# Altium PCB Vest.PcbDoc (part 1 of 2)
Units mm, origin at the board's own origin, x right, y up, seen from the top; angles counter-clockwise.
Board outline 98 x 59.3 mm, 4 copper layers (Top Layer, GND, Power, Bottom Layer), stack 0.603 mm thick; 89 components, 60 nets, 266 pads, 74 vias.
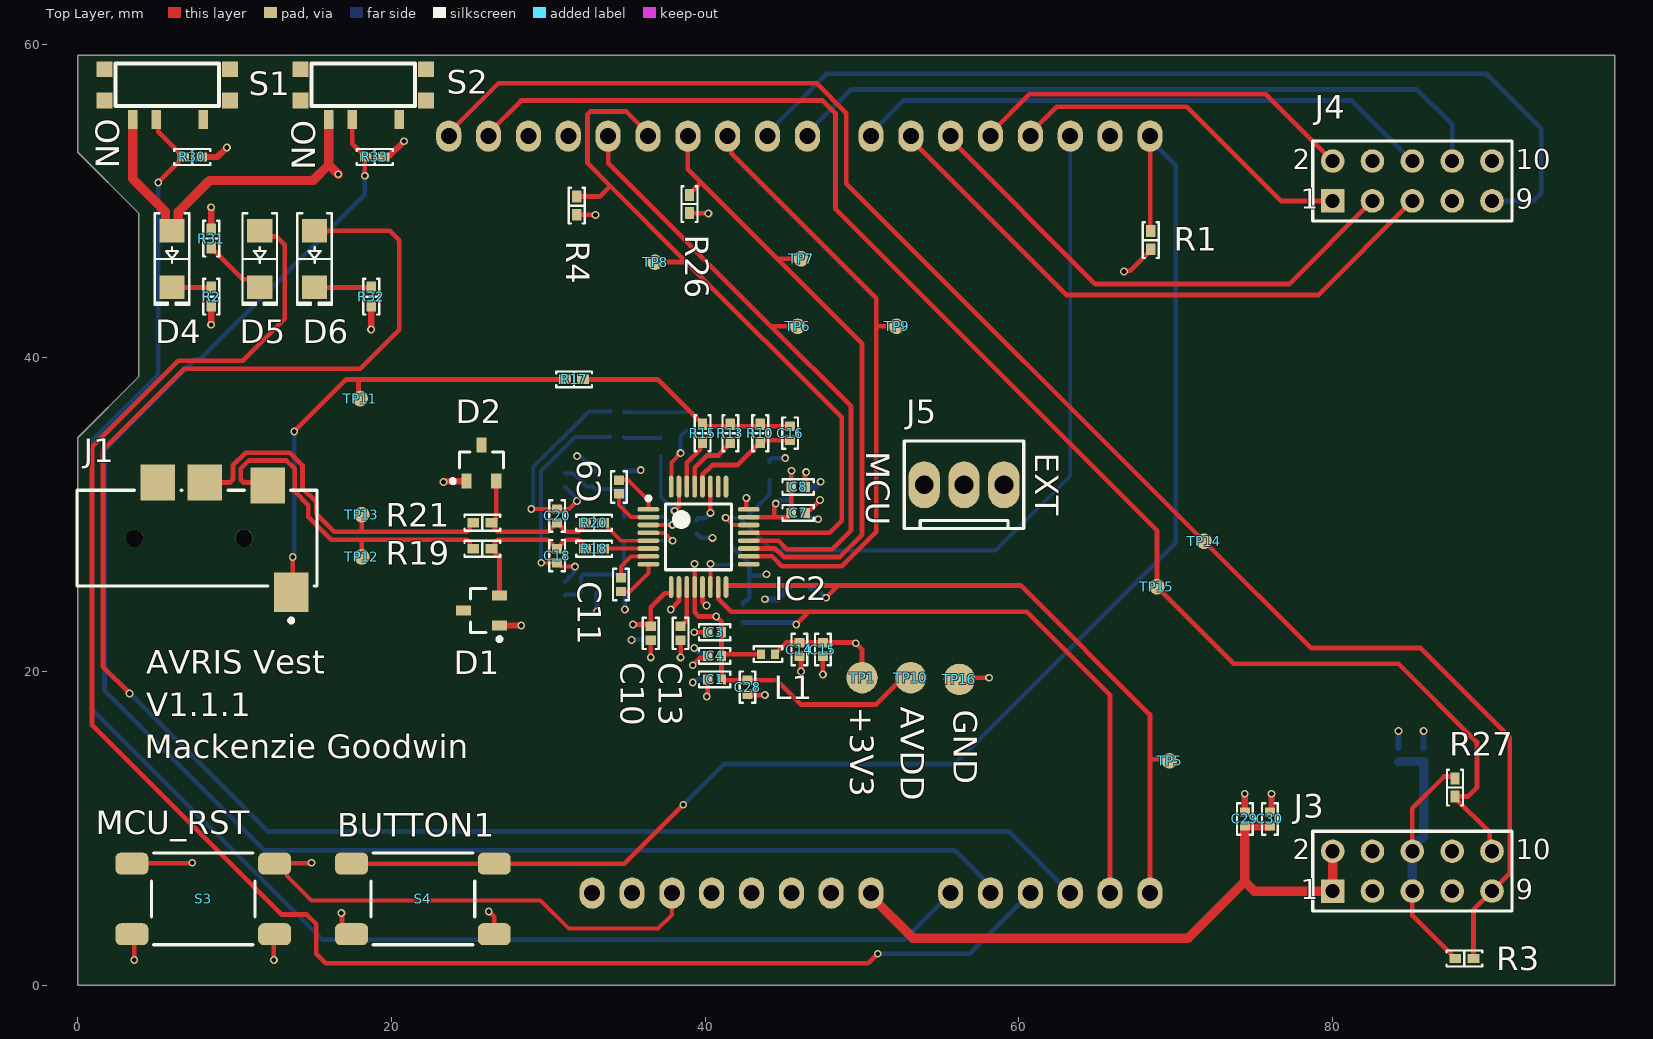
[diagram p0: Top Layer view]
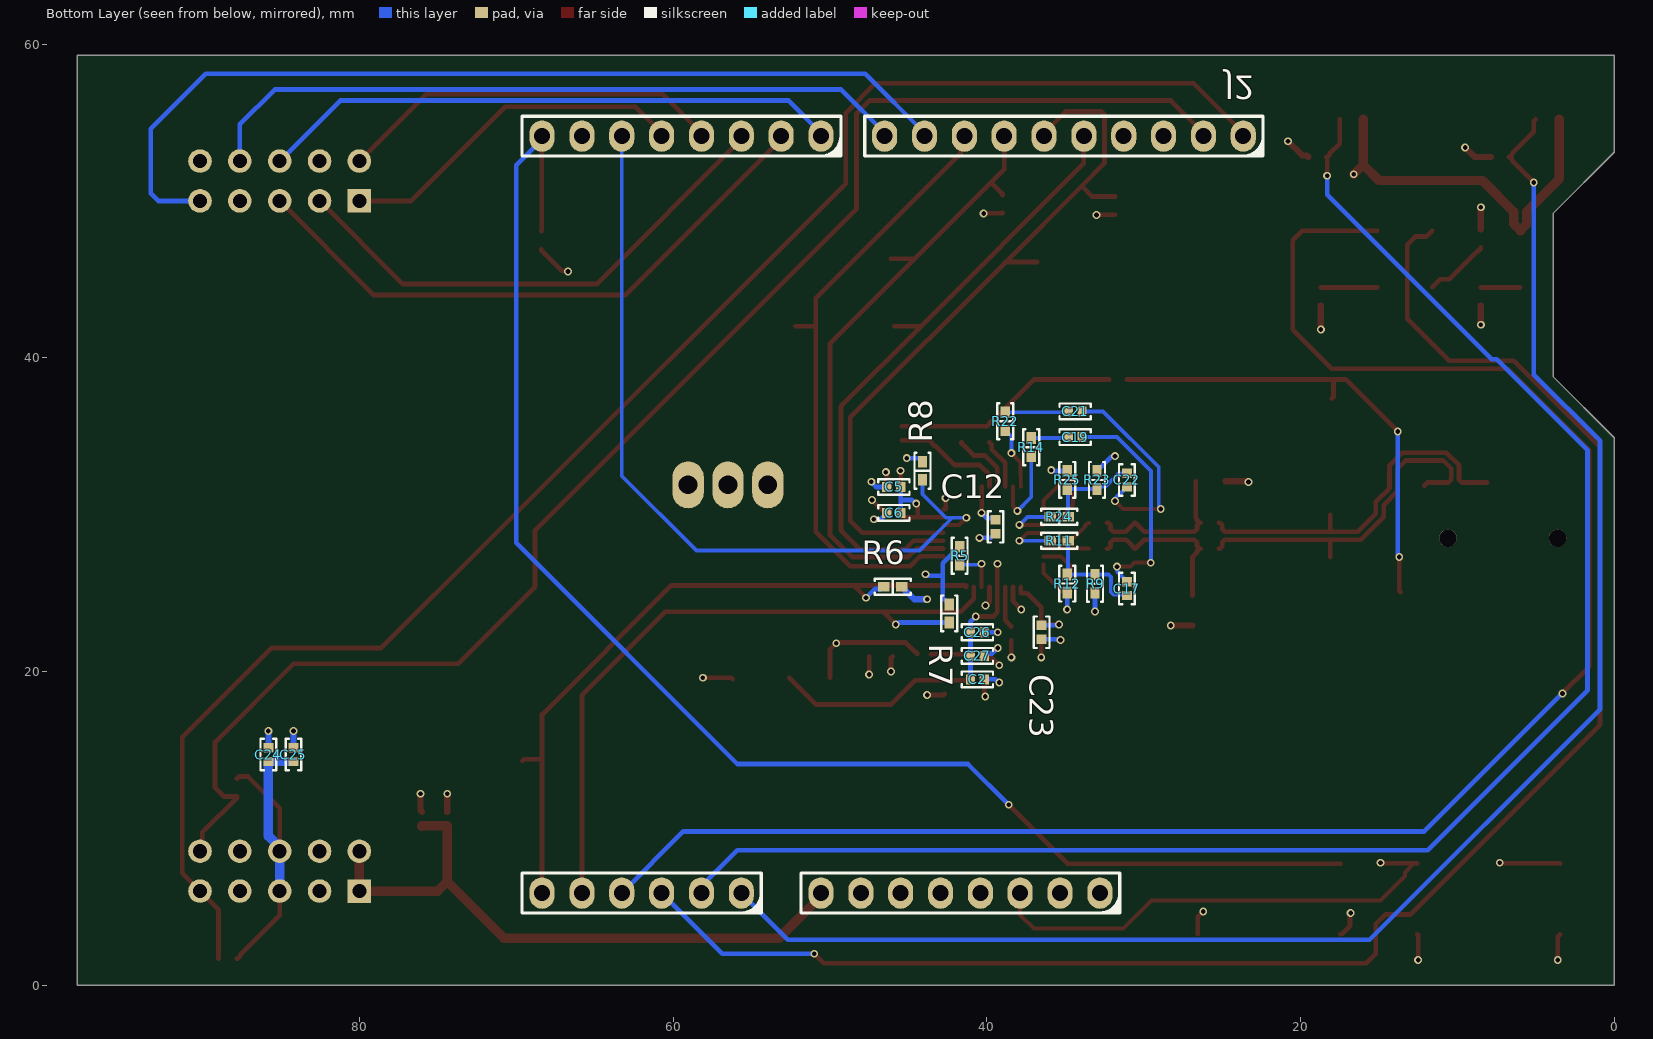
[diagram p1: Bottom Layer view, seen from below]
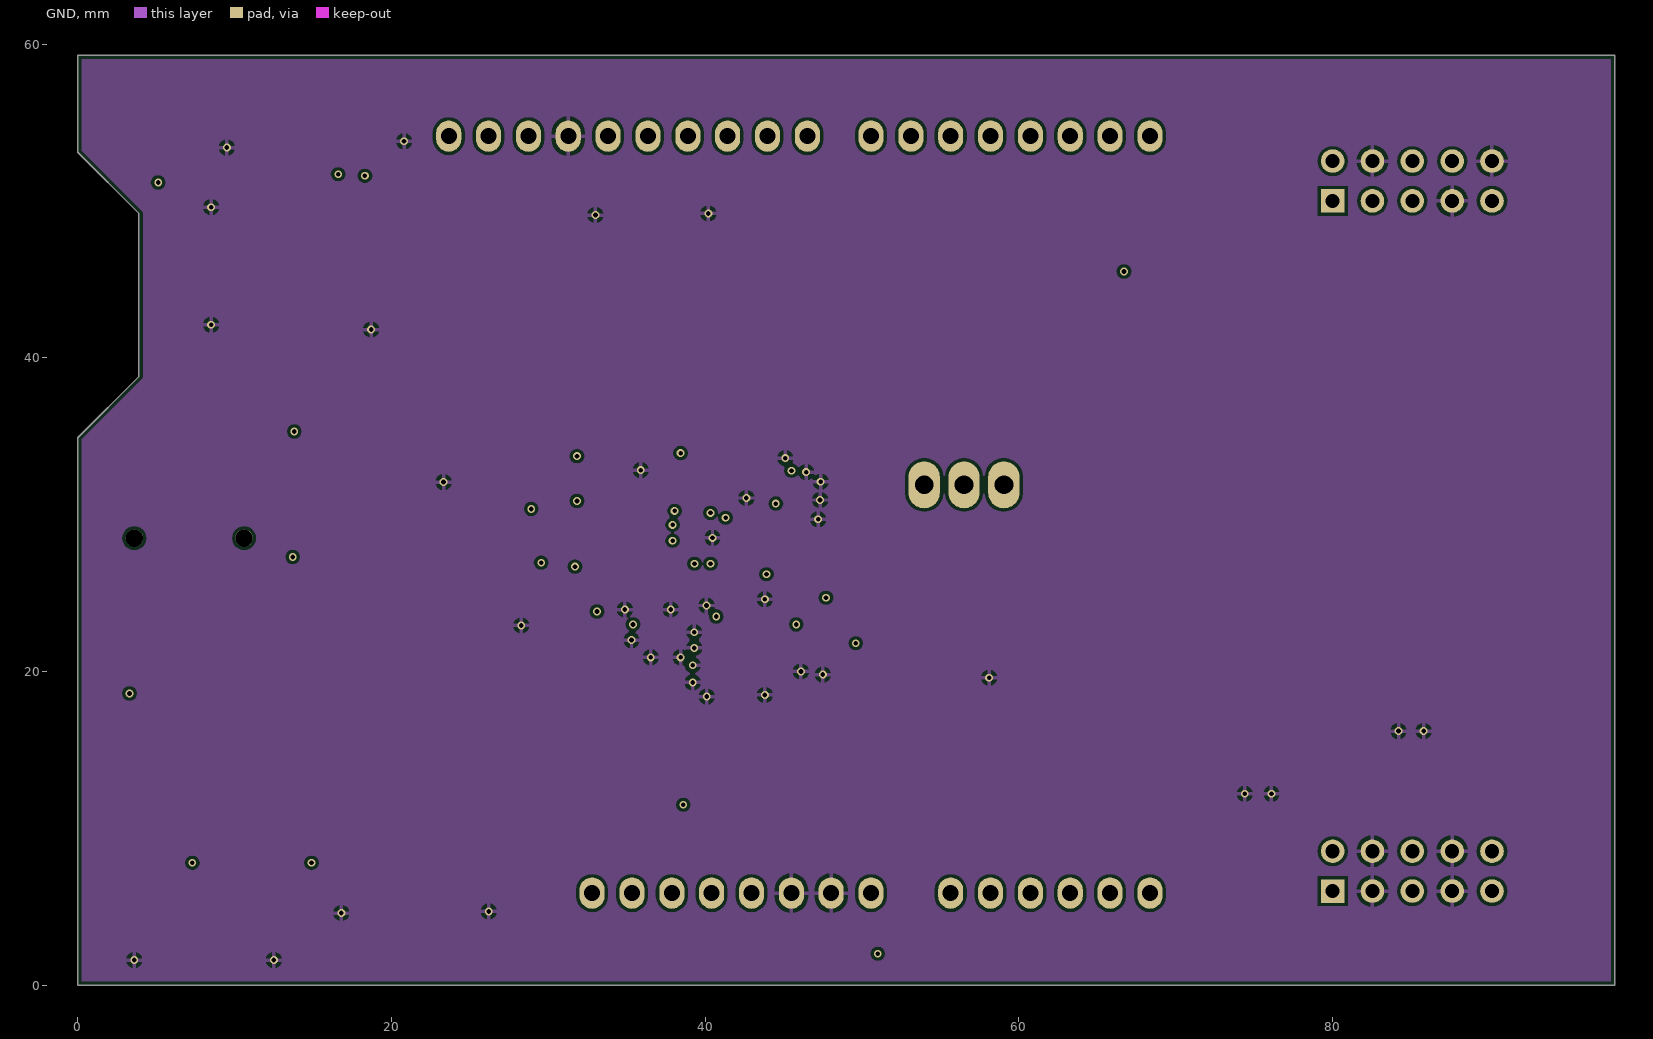
[diagram p2: GND]
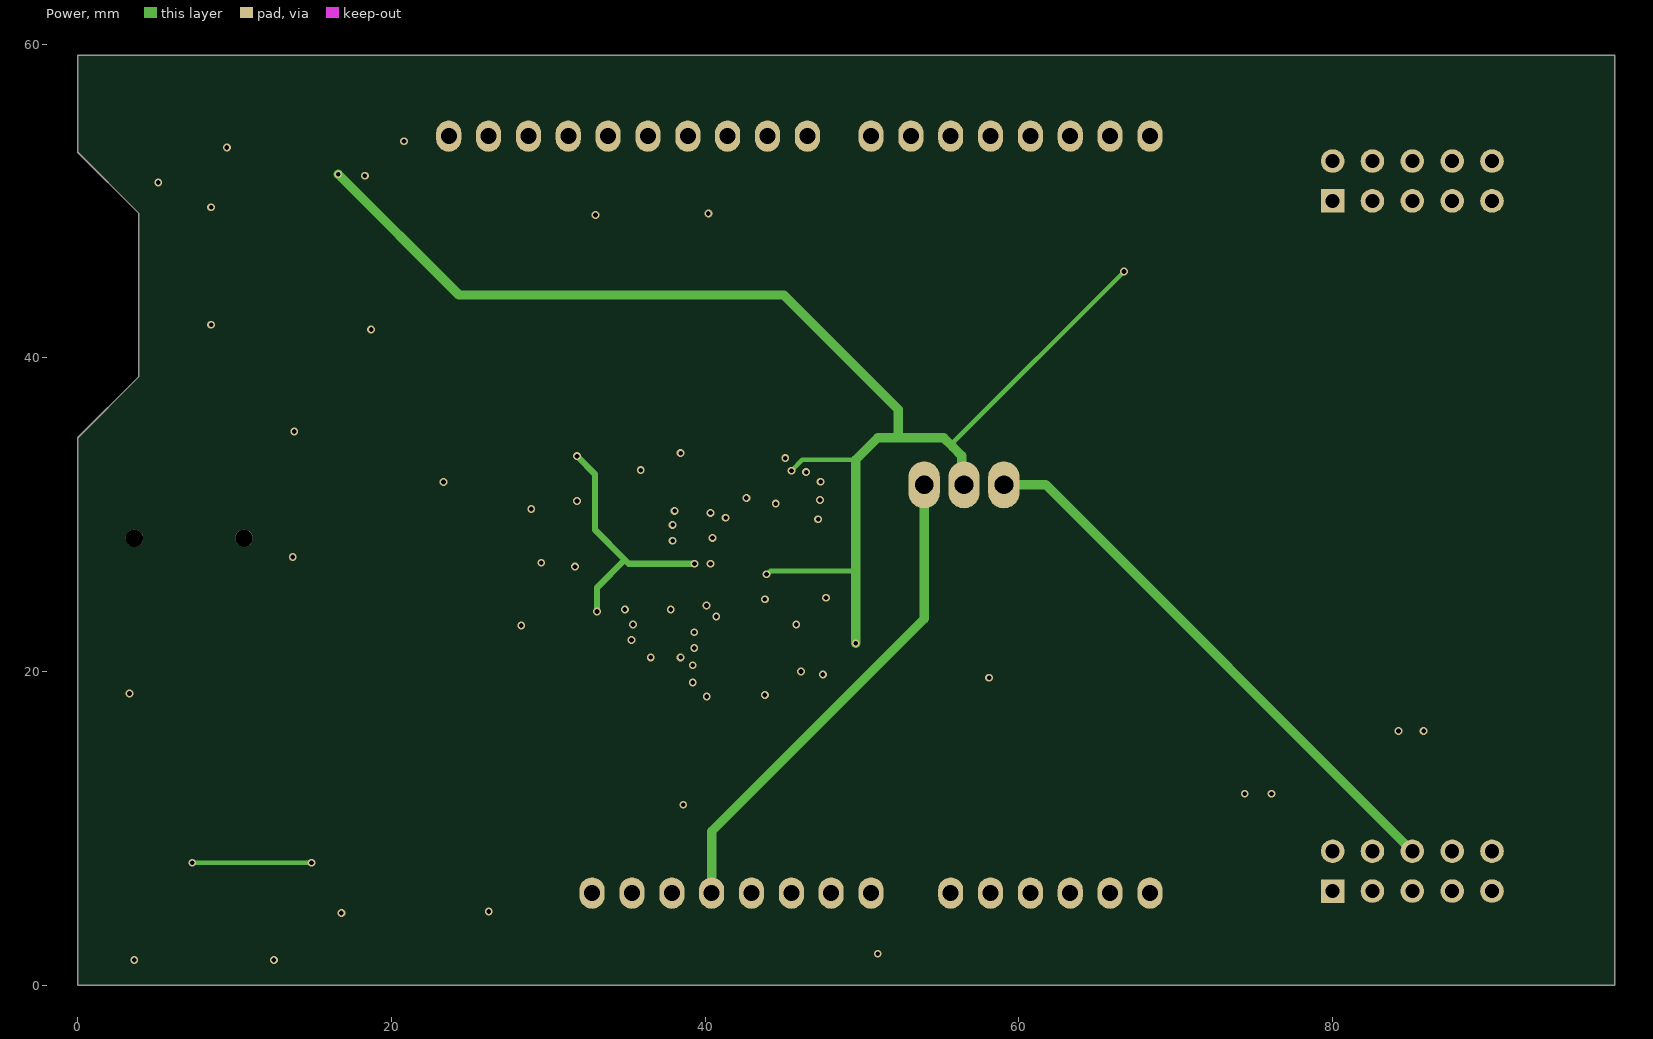
[diagram p3: Power]

## Layer stack, top to bottom
Top Solder: solder mask 0.0102, Solder Resist, Dk 3.5
Top Layer: signal copper 0.0356
Dielectric 2: prepreg 0.0711, PP-006, Dk 4.1
GND: signal copper 0.035
Dielectric 1: dielectric 0.32, FR-4, Dk 4.8
Power: signal copper 0.035
Dielectric 3: prepreg 0.0711, PP-006, Dk 4.1
Bottom Layer: signal copper 0.0356
Bottom Solder: solder mask 0.0102, Solder Resist, Dk 3.5

## Board outline
3.9,49.2 0,53.1 0,59.3 98,59.3 98,0 0,0 0,34.9 3.9,38.8

## Design rules (kind name [scope] priority, off if disabled: settings)
AssemblyTestPointUsage [All] p1: allowmultiple=TRUE
AssemblyTestpoint [All] p1: testpointundercomponent=TRUE minsize=0 maxsize=3 preferedsize=1.5 minholesize=0 maxholesize=1.016 preferedholesize=0 testpointgrid=0.025 usegrid=TRUE gridtolerance=0 allowsidetop=TRUE allowsidebottom=TRUE
BoardOutlineClearance [All] p1: gap=0.254 ignorepadtopadclearanceinfootprint=FALSE
Clearance [All] p1: gap=0.2 ignorepadtopadclearanceinfootprint=FALSE
DiffPairsRouting [All] p1: maxlimit=0.254 minlimit=0.2 mostfreqgap=0.2 toplayer_minwidth=0.2 toplayer_maxwidth=0.5 toplayer_prefwidth=0.3 midlayer1_minwidth=0.2 midlayer1_maxwidth=0.5 midlayer1_prefwidth=0.3 midlayer2_minwidth=0.2 midlayer2_maxwidth=0.5 midlayer2_prefwidth=0.3 bottomlayer_minwidth=0.2 bottomlayer_maxwidth=0.5 bottomlayer_prefwidth=0.3 maxuncoupledlength=12.7
FabricationTestPointUsage [All] p1: valid=0 allowmultiple=TRUE
FabricationTestpoint [All] p1: side=3 testpointundercomponent=TRUE minsize=1 maxsize=3 preferedsize=1.5 minholesize=0 maxholesize=1.016 preferedholesize=0 testpointgrid=0.025 allowsidetop=TRUE allowsidebottom=TRUE usegrid=TRUE gridtolerance=0
MinimumSolderMaskSliver [All] p1: minsoldermaskwidth=0.1
PolygonConnect [All] p1: connectstyle=Relief reliefconductorwidth=0.254 reliefentries=4 polygonreliefangle="90 Angle" airgapwidth=0.254
RoutingVias [All] p1: holewidth=0.2 width=0.5 viastyle="Through Hole" minholewidth=0.3 minwidth=0.5 maxholewidth=0.7 maxwidth=1.5
SilkToSilkClearance [All] p1: silktosilkclearance=0.2
SilkToSolderMaskClearance [IsPad] p1: minsilkscreentomaskgap=0.1 clearancetoexposedcopper=TRUE
SolderMaskExpansion [All] p1: expansion=0.102 istentingtop=FALSE
Width [All] p1: maxlimit=1 minlimit=0.2 preferedwidth=0.3
22 further rules are at their usual default settings.

## Classes and differential pairs
net class SWT[1..2]: SWT1 SWT2
net class LED[1..2]: LED1 LED2
component class External: C24 C25 C29 C30 J3 J4 R3 R27
net class GPIO[1..7]: GPIO1 GPIO2 GPIO3 GPIO4 GPIO5 GPIO6 GPIO7
component class Vest: D4 D5 D6 J5 R1 R2 R30 R31 R32 R33 S1 S2 S3 S4 TP1 TP16
component class MCU: J2 R4 R26 TP14 TP15
component class ECG: C1 C2 C3 C4 C5 C6 C7 C8 C9 C10 C11 C12 C13 C14 C15 C16 C17 C18 C19 C20 C21 C22 C23 C26 C27 C28 D1 D2 IC2 L1 R5 R6 R7 R8 R9 R10 R11 R12 R13 R14 R15 R17 R18 R19 R20 R21 R22 R23 R24 R25 TP5 TP6 TP7 TP8 TP9 TP10 TP11 TP12 TP13
differential pair IN: +IN_P -IN_N
differential pair INPROT: +INPROT_P -INPROT_N

## Components (designator, comment, footprint, x,y, rotation, side; value= is the part's Value field where it differs from the comment)
C1 "10µF" "CAP 0402_1005" 40.6,19.5 r180 top
C2 "0.1µF" "CAP 0402_1005" 40.6,19.5 r180 bottom
C3 "0.1µF" "CAP 0402_1005" 40.6,22.5 r180 top
C4 "1µF" "CAP 0402_1005" 40.6,21 r180 top
C5 "0.1µF" "CAP 0402_1005" 45.925,31.761 r0 bottom
C6 "0.1µF" "CAP 0402_1005" 45.925,30.11 r0 bottom
C7 "1µF" "CAP 0402_1005" 45.925,30.11 r0 top
C8 "1µF" "CAP 0402_1005" 45.925,31.761 r0 top
C9 "4700pF" "CAP 0402_1005" 34.495,31.761 r90 top
C10 "10µF" "CAP 0402_1005" 36.527,22.431 r270 top
C11 "4700pF" "CAP 0402_1005" 34.622,25.538 r90 top
C12 "1µF" "CAP 0402_1005" 39.448,29.221 r270 bottom
C13 "1µF" "CAP 0402_1005" 38.432,22.431 r270 top
C14 "1µF" "CAP 0402_1005" 46,21.4 r270 top
C15 "0.1µF" "CAP 0402_1005" 47.5,21.4 r270 top
C16 "1500pF" "CAP 0402_1005" 45.417,35.19 r90 top
C17 "2200pF" "CAP 0402_1005" 31.066,25.284 r90 bottom
C18 "0.1µF" "CAP 0402_1005" 30.558,27.384 r90 top
C19 "2200pF" "CAP 0402_1005" 34.368,34.936 r180 bottom
C20 "0.1µF" "CAP 0402_1005" 30.558,29.915 r270 top
C21 "2200pF" "CAP 0402_1005" 34.368,36.587 r180 bottom
C22 "2200pF" "CAP 0402_1005" 31.066,32.21 r90 bottom
C23 "0.1µF" "CAP 0402_1005" 36.5,22.5 r270 bottom
C24 "1µF" "CAP 0402_1005" 85.8,14.7 r90 bottom
C25 "0.1µF" "CAP 0402_1005" 84.2,14.7 r90 bottom
C26 "1µF" "CAP 0402_1005" 40.6,22.5 r180 bottom
C27 "1µF" "CAP 0402_1005" 40.6,21 r180 bottom
C28 "10µF" "CAP 0402_1005" 42.7,19 r270 top
C29 "1µF" "CAP 0402_1005" 74.4,10.6 r90 top
C30 "0.1µF" "CAP 0402_1005" 76,10.6 r90 top
D1 "PESD5V0X1BT,215" "DIODES SOT-23-3" 25.732,23.887 r180 top
D2 "PESD5V0X1BT,215" "DIODES SOT-23-3" 25.732,33.285 r90 top
D4 "Red" "LED 1206_3216 RED" 6,46.3 r270 top
D5 "Red" "LED 1206_3216 RED" 11.6,46.3 r270 top
D6 "Red" "LED 1206_3216 RED" 15.1,46.3 r270 top
IC2 "ADS1292RIPBS" "TI PQFP-32 5X5MM" 39.575,28.586 r0 top
J1 "SJ2-3574A-SMT-TR" "CUI SJ2-3574A-SMT-TR" 7.6,28.5 r0 top
J2 "920-0088-01" "SCHMARTBOARD - 920-0088-01" 46,30 r90 bottom locked
J3 "Header 5X2" HDR2X5 80,6 r0 top
J4 "Header 5X2" HDR2X5 80,50 r0 top
J5 "0022272031" "MOLEX KK 0022272031" 56.5,31.9 r0 top
L1 "560nH" "IND 0402_1005" 44,21.1 r180 top
R1 "10 kΩ" "RES 0402_1005" 68.4,47.5 r90 top value="10 kOhms"
R2 "1.6 kΩ" "RES 0402_1005" 8.5,43.9 r90 top value="1.6 kOhms"
R3 "10 kΩ" "RES 0402_1005" 88.4,1.7 r0 top value="10 kOhms"
R4 "100 kΩ" "RES 0402_1005" 31.8,49.7 r270 top value="100 kOhms"
R5 "10 kΩ" "RES 0402_1005" 41.734,27.376 r270 bottom value="10 kOhms"
R6 "10 kΩ" "RES 0402_1005" 46,25.4 r180 bottom value="10 kOhms"
R7 "10 kΩ" "RES 0402_1005" 42.4,23.7 r270 bottom value="10 kOhms"
R8 "10 kΩ" "RES 0402_1005" 44.1,32.8 r90 bottom value="10 kOhms"
R9 "10 MΩ" "RES 0402_1005" 33.098,25.598 r90 bottom value="10 MOhms"
R10 "1 MΩ" "RES 0402_1005" 43.512,35.19 r90 top value="1 MOhms"
R11 "0 Ω" "RES 0402_1005" 35.384,28.332 r180 bottom value="0 Ohms"
R12 "10 MΩ" "RES 0402_1005" 34.876,25.605 r90 bottom value="10 MOhms"
R13 "100 kΩ" "RES 0402_1005" 41.607,35.19 r90 top value="100 kOhms"
R14 "40.2 kΩ" "RES 0402_1005" 37.162,34.301 r90 bottom value="40.2 kOhms"
R15 "0 Ω" "RES 0402_1005" 39.829,35.19 r270 top value="0 Ohms"
R17 "100 kΩ" "RES 0402_1005" 31.634,38.619 r0 top value="100 kOhms"
R18 "0 Ω" "RES 0402_1005" 32.911,27.824 r180 top value="0 Ohms"
R19 "100 kΩ" "RES 0402_1005" 25.792,27.824 r180 top value="100 kOhms"
R20 "0 Ω" "RES 0402_1005" 32.911,29.475 r180 top value="0 Ohms"
R21 "100 kΩ" "RES 0402_1005" 25.792,29.475 r180 top value="100 kOhms"
R22 "40.2 kΩ" "RES 0402_1005" 38.813,35.952 r90 bottom value="40.2 kOhms"
R23 "10 MΩ" "RES 0402_1005" 32.971,32.209 r270 bottom value="10 MOhms"
R24 "0 Ω" "RES 0402_1005" 35.384,29.856 r180 bottom value="0 Ohms"
R25 "10 MΩ" "RES 0402_1005" 34.876,32.209 r270 bottom value="10 MOhms"
R26 "100 kΩ" "RES 0402_1005" 39,49.8 r270 top value="100 kOhms"
R27 "10 kΩ" "RES 0402_1005" 87.8,12.6 r270 top value="10 kOhms"
R30 "10 kΩ" "RES 0402_1005" 7.3,52.8 r0 top value="10 kOhms"
R31 "1.6 kΩ" "RES 0402_1005" 8.5,47.6 r270 top value="1.6 kOhms"
R32 "1.6 kΩ" "RES 0402_1005" 18.7,43.9 r90 top value="1.6 kOhms"
R33 "10 kΩ" "RES 0402_1005" 18.925,52.8 r0 top value="10 kOhms"
S1 "CUS-12TB" "NCE CUS-12TB" 5.7,57.4 r180 top
S2 "CUS-12TB" "NCE CUS-12TB" 18.2,57.4 r180 top
S3 "1571563-4" "TE FSM4JSMA" 8,5.5 r90 top
S4 "1571563-4" "TE FSM4JSMA" 22,5.5 r90 top
TP1 "TP2MM" "Test Point 2MM" 50,19.6 r0 top
TP5 "TP1MM" "Test Point 1MM" 69.6,14.3 r180 top
TP6 "TP1MM" "Test Point 1MM" 45.9,42 r180 top
TP7 "TP1MM" "Test Point 1MM" 46.113,46.311 r180 top
TP8 "TP1MM" "Test Point 1MM" 36.8,46.1 r180 top
TP9 "TP1MM" "Test Point 1MM" 52.2,42 r180 top
TP10 "TP2MM" "Test Point 2MM" 53.1,19.6 r90 top
TP11 "TP1MM" "Test Point 1MM" 18,37.4 r90 top
TP12 "TP1MM" "Test Point 1MM" 18.1,27.3 r180 top
TP13 "TP1MM" "Test Point 1MM" 18.1,30 r180 top
TP14 "TP1MM" "Test Point 1MM" 71.8,28.3 r90 top
TP15 "TP1MM" "Test Point 1MM" 68.8,25.4 r90 top
TP16 "TP2MM" "Test Point 2MM" 56.2,19.5 r90 top

## Footprints (in the part's own frame and the unit in brackets; to place one, negate y for a bottom-side part, rotate by r counter-clockwise, add the part's x,y. Pads: shape width x height; smd on the part's side, far side on the other; paste and mask are expansions set on the pad)
"CAP 0402_1005" [mm] "Chip Capacitor, 2-Leads, Body 1.02x0.51mm, IPC Medium Density"
  rect 0.6x0.64 smd: 1(-0.44,0) 2(0.44,0)
  silkscreen extent -1,-0.5 1,0.5, body extent -0.5,-0.26 0.5,0.26, height 0.52
"CUI SJ2-3574A-SMT-TR" [mm]
  rect 2.2x2.5 smd paste+0 mask+0: 1(6,-3.45)
  rect 2.2x2.3 smd paste+0 mask+0: 2(4.5,3.35) 3(0.5,3.55) 4(-2.5,3.55)
  round 1.1 hole 1.1 unplated paste-1000 mask+0: ""(-4,0) ""(3,0)
  silkscreen extent -7.65,-5.37 7.65,3.05, body extent -7.63,-4.2 7.37,4.2, height 5.35
"DIODES SOT-23-3" [mm] "SOT23, 3-Leads, Body 2.90x2.40mm, Pitch 0.95mm, IPC Medium Density"
  rect 0.95x0.65 smd: 1(-1.15,0.95) 2(-1.15,-0.95) 3(1.15,0)
  silkscreen extent -1.28,-1.4 0.7,1.95, body extent -1.41,-1.45 1.41,1.45, height 1.5
HDR2X5 [mm] "Connector; Header; 5x2 Position"
  rect 1.5x1.5 hole 0.9: 1(0,0)
  round 1.5 hole 0.9: 2(0,2.54) 3(2.54,0) 4(2.54,2.54) 5(5.08,0) 6(5.08,2.54) 7(7.62,0) 8(7.62,2.54) 9(10.16,0) 10(10.16,2.54)
  silkscreen extent -1.27,-1.27 11.43,3.81
"IND 0402_1005" [mm] "Inductor, 2-Leads, Body 1.02x0.51mm, IPC Medium Density"
  rect 0.5x0.6 smd: 1(-0.44,0) 2(0.44,0)
  silkscreen extent -0.9,-0.5 0.9,0.5, body extent -0.5,-0.3 0.5,0.3, height 0.6
"LED 1206_3216 RED" [mm] "Chip Diode, 2-Leads, Body 3.13x1.55mm, IPC Medium Density"
  rect 1.5x1.6 smd: 1(-1.8,0) 2(1.8,0)
  silkscreen extent -2.92,-1.1 2.92,1.1, body extent -1.6,-0.8 1.6,0.8, height 0.9
"MOLEX KK 0022272031" [mm]
  oval 2x3 hole 1.2: 1(-2.54,0) 2(0,0) 3(2.54,0)
  silkscreen extent -3.81,-2.79 3.81,2.79, body extent -3.81,-2.9 3.81,2.9, height 11.7
"NCE CUS-12TB" [mm]
  rect 1x1 smd: 0(-4,-1) 0(-4,1) 0(4,-1) 0(4,1)
  round 1 on Mech1: 0(-1.4,0) 0(1.4,0)
  rect 0.6x1.2 smd: 1(-2.3,2.2) 2(0.7,2.2) 3(2.2,2.2)
  silkscreen extent -3.3,-1.35 3.3,1.35, body extent -3.85,-2.8 3.85,2.2, height 1.4
"RES 0402_1005" [mm] "Chip Resistor, 2-Leads, Body 1.0x0.5mm, IPC Medium Density"
  rect 0.75x0.6 smd: 1(-0.575,0) 2(0.575,0)
  silkscreen extent -1.14,-0.51 1.14,0.51, body extent -0.5,-0.25 0.5,0.25, height 0.35
"SCHMARTBOARD - 920-0088-01" [mm] "Arduino pin header set"
  oval 2x1.6 hole 1.02: 1(-24.13,-13.21) 2(-24.13,-10.67) 3(-24.13,-8.13) 4(-24.13,-5.59) 5(-24.13,-3.05) 6(-24.13,-0.51) 7(-24.13,2.03) 8(-24.13,4.57) 9(-24.13,9.65) 10(-24.13,12.19) 11(-24.13,14.73) 12(-24.13,17.27) 13(-24.13,19.81) 14(-24.13,22.35) 15(24.13,22.35) 16(24.13,19.81) 17(24.13,17.27) 18(24.13,14.73) 19(24.13,12.19) 20(24.13,9.65) 21(24.13,7.11) 22(24.13,4.57) 23(24.13,0.51) 24(24.13,-2.03) 25(24.13,-4.57) 26(24.13,-7.11) 27(24.13,-9.65) 28(24.13,-12.19) 29(24.13,-14.73) 30(24.13,-17.27) 31(24.13,-19.81) 32(24.13,-22.35)
  silkscreen extent -25.4,-23.62 25.4,23.62, body extent -25.4,-23.62 25.4,23.62, height 8.5
"TE FSM4JSMA" [mm]
  rrect50% 1.4x2.1 smd: 1(2.25,4.55) 2(2.25,-4.55) 3(-2.25,4.55) 4(-2.25,-4.55)
  silkscreen extent -2.92,-3.3 2.92,3.3, body extent -3,-5 3,5, height 5.08
"Test Point 1MM" [mm]
  round 1 smd: 1(0,0)
"Test Point 2MM" [mm]
  round 2 smd: 1(0,0)
"TI PQFP-32 5X5MM" [mm] "TSQFP, 32-Leads, Body 5.00x5.00mm, Pitch 0.50mm, IPC Medium Density"
  oval 1.4x0.3 smd: 1(-3.2,1.75) 2(-3.2,1.25) 3(-3.2,0.75) 4(-3.2,0.25) 5(-3.2,-0.25) 6(-3.2,-0.75) 7(-3.2,-1.25) 8(-3.2,-1.75) 17(3.2,-1.75) 18(3.2,-1.25) 19(3.2,-0.75) 20(3.2,-0.25) 21(3.2,0.25) 22(3.2,0.75) 23(3.2,1.25) 24(3.2,1.75)
  oval 0.3x1.4 smd: 9(-1.75,-3.2) 10(-1.25,-3.2) 11(-0.75,-3.2) 12(-0.25,-3.2) 13(0.25,-3.2) 14(0.75,-3.2) 15(1.25,-3.2) 16(1.75,-3.2) 25(1.75,3.2) 26(1.25,3.2) 27(0.75,3.2) 28(0.25,3.2) 29(-0.25,3.2) 30(-0.75,3.2) 31(-1.25,3.2) 32(-1.75,3.2)
  silkscreen extent -3.32,-2.1 2.1,2.57, body extent -2.5,-2.5 2.5,2.5, height 1.2

## Part data
C1 C10 C28: library part 0402ZD106MAT2A, "CAP CER 10UF 10V X5R 0402", Device Package="0402 (1005 Metric)", Manufacturer="AVX Corporation", Operating Temperature="-55°C ~ 85°C", Supplier Part Number 1=478-10052-1-ND, Temperature Coefficient=X5R, Tolerance=±20%, Voltage - Rated=10V, Applications="General Purpose", Capacitance=10µF, ComponentLink1Description=Datasheet, ComponentLink1URL=http://datasheets.avx.com/cx5r.pdf, ComponentLink2Description="DigiKey Link", ComponentLink2URL=http://digikey.com/product-detail/en/avx-corporation/0402ZD106MAT2A/478-10052-1-ND/6564275, LastUpdated="2020-02-03 5:04:16 PM", Lifecycle Status=Active, Minimum Order=1, Mounting Type="Surface Mount, MLCC", Package / Case="0402 (1005 Metric)", Packaging=TapeAndReel, Part Number=0402ZD106MAT2A, Part Status=Active, Price=0.24, Series=-, Size / Dimension="0.039\" L x 0.020\" W (1.00mm x 0.50mm)", Supplier 1=DigiKey, Thickness (Max)="0.028\" (0.71mm)"
C2 C3 C5 C6 C15 C23 C25 C30: library part 04023C104JAT2A, "CAP CER 0.1UF 25V X7R 0402", Device Package="0402 (1005 Metric)", Manufacturer="AVX Corporation", Operating Temperature="-55°C ~ 125°C", Supplier Part Number 1=478-10050-1-ND, Temperature Coefficient=X7R, Tolerance=±5%, Voltage - Rated=25V, Applications="General Purpose", Capacitance=0.1µF, ComponentLink1Description=Datasheet, ComponentLink1URL=http://datasheets.avx.com/X7RDielectric.pdf, ComponentLink2Description="DigiKey Link", ComponentLink2URL=http://digikey.com/product-detail/en/avx-corporation/04023C104JAT2A/478-10050-1-ND/6564273, LastUpdated="2020-02-03 5:03:51 PM", Lifecycle Status=Active, Minimum Order=1, Mounting Type="Surface Mount, MLCC", Package / Case="0402 (1005 Metric)", Packaging=CutTape, Part Number=04023C104JAT2A, Part Status=Active, Price=0.14, Series=-, Size / Dimension="0.039\" L x 0.020\" W (1.00mm x 0.50mm)", Supplier 1=DigiKey, Thickness (Max)="0.022\" (0.56mm)"
C4 C7 C8 C12 C13 C14 C24 C26 C27 C29: library part 0402ZD105KAT2A, "CAP CER 1UF 10V X5R 0402", Device Package="0402 (1005 Metric)", Manufacturer="AVX Corporation", Operating Temperature="-55°C ~ 85°C", Supplier Part Number 1=478-4596-1-ND, Temperature Coefficient=X5R, Tolerance=±10%, Voltage - Rated=10V, Applications="General Purpose", Capacitance=1µF, ComponentLink1Description=Datasheet, ComponentLink1URL=http://datasheets.avx.com/cx5r.pdf, ComponentLink2Description="DigiKey Link", ComponentLink2URL=http://digikey.com/product-detail/en/avx-corporation/0402ZD105KAT2A/478-4596-1-ND/1645907, LastUpdated="2020-02-03 5:04:20 PM", Lifecycle Status=Active, Minimum Order=1, Mounting Type="Surface Mount, MLCC", Package / Case="0402 (1005 Metric)", Packaging=TapeAndReel, Part Number=0402ZD105KAT2A, Part Status=Active, Price=0.03, Series=-, Size / Dimension="0.039\" L x 0.020\" W (1.00mm x 0.50mm)", Supplier 1=DigiKey, Thickness (Max)="0.022\" (0.56mm)"
C9 C11: library part C0402C472K4RECAUTO, "CAP CER 0402 4.7NF 16V X7R 10%", Device Package="0402 (1005 Metric)", Manufacturer=KEMET, Operating Temperature="-55°C ~ 125°C", Ratings=AEC-Q200, Supplier Part Number 1=399-17875-1-ND, Temperature Coefficient=X7R, Tolerance=±10%, Voltage - Rated=16V, Applications="Automotive, ESD Protection", Capacitance=4700pF, ComponentLink1Description=Datasheet, ComponentLink1URL=https://api.kemet.com/component-edge/download/datasheet/C0402C472K4RECAUTO.pdf, ComponentLink2Description="DigiKey Link", ComponentLink2URL=http://digikey.com/product-detail/en/kemet/C0402C472K4RECAUTO/399-17875-1-ND/8640542, LastUpdated="2020-02-03 5:04:46 PM", Lifecycle Status=Active, Minimum Order=1, Mounting Type="Surface Mount, MLCC", Package / Case="0402 (1005 Metric)", Packaging=TapeAndReel, Part Number=C0402C472K4RECAUTO, Part Status=Active, Price=0.02, Series="ESD SMD Auto X7R", Size / Dimension="0.039\" L x 0.020\" W (1.00mm x 0.50mm)", Supplier 1=DigiKey, Thickness (Max)="0.022\" (0.55mm)"
C16: library part C0402C152K5GECAUTO, "CAP CER 0402 1.5NF 50V C0G 10%", Device Package="0402 (1005 Metric)", Manufacturer=KEMET, Operating Temperature="-55°C ~ 125°C", Ratings=AEC-Q200, Supplier Part Number 1=399-17901-1-ND, Temperature Coefficient="C0G, NP0", Tolerance=±10%, Voltage - Rated=50V, Applications="Automotive, ESD Protection", Capacitance=1500pF, ComponentLink1Description=Datasheet, ComponentLink1URL=https://api.kemet.com/component-edge/download/datasheet/C0402C152K5GECAUTO.pdf, ComponentLink2Description="DigiKey Link", ComponentLink2URL=http://digikey.com/product-detail/en/kemet/C0402C152K5GECAUTO/399-17901-1-ND/8640568, Features="Low ESL", LastUpdated="2020-02-03 5:04:46 PM", Lifecycle Status=Active, Minimum Order=1, Mounting Type="Surface Mount, MLCC", Package / Case="0402 (1005 Metric)", Packaging=TapeAndReel, Part Number=C0402C152K5GECAUTO, Part Status=Active, Price=0.02, Series="ESD SMD Auto C0G", Size / Dimension="0.039\" L x 0.020\" W (1.00mm x 0.50mm)", Supplier 1=DigiKey, Thickness (Max)="0.022\" (0.55mm)"
C17 C19 C21 C22: library part 04023C222JAT2A, "CAP CER 2200PF 25V X7R 0402", Device Package="0402 (1005 Metric)", Manufacturer="AVX Corporation", Operating Temperature="-55°C ~ 125°C", Supplier Part Number 1=478-12619-1-ND, Temperature Coefficient=X7R, Tolerance=±5%, Voltage - Rated=25V, Applications="General Purpose", Capacitance=2200pF, ComponentLink1Description=Datasheet, ComponentLink1URL=http://datasheets.avx.com/X7RDielectric.pdf, ComponentLink2Description="DigiKey Link", ComponentLink2URL=http://digikey.com/product-detail/en/avx-corporation/04023C222JAT2A/478-12619-1-ND/9949157, LastUpdated="2020-02-03 5:04:22 PM", Lifecycle Status=Active, Minimum Order=1, Mounting Type="Surface Mount, MLCC", Package / Case="0402 (1005 Metric)", Packaging=TapeAndReel, Part Number=04023C222JAT2A, Part Status=Active, Price=0.01, Series=-, Size / Dimension="0.039\" L x 0.020\" W (1.00mm x 0.50mm)", Supplier 1=DigiKey, Thickness (Max)="0.022\" (0.56mm)"
C18 C20: library part 0402B104J160CT, "CAP CER 0.1UF 16V X7R 0402", Device Package="0402 (1005 Metric)", Manufacturer="Walsin Technology Corporation", Operating Temperature="-55°C ~ 125°C", Supplier Part Number 1=1292-1174-1-ND, Temperature Coefficient=X7R, Tolerance=±5%, Voltage - Rated=16V, Applications="General Purpose", Capacitance=0.1µF, ComponentLink1Description=Datasheet, ComponentLink1URL=http://www.passivecomponent.com/wp-content/uploads/2018/10/MLCC.pdf, ComponentLink2Description="DigiKey Link", ComponentLink2URL=http://digikey.com/product-detail/en/walsin-technology-corporation/0402B104J160CT/1292-1174-1-ND/9355178, LastUpdated="2020-02-03 5:04:13 PM", Lifecycle Status=Active, Minimum Order=1, Mounting Type="Surface Mount, MLCC", Package / Case="0402 (1005 Metric)", Packaging=TapeAndReel, Part Number=0402B104J160CT, Part Status=Active, Price=0.01, Series=-, Size / Dimension="0.039\" L x 0.020\" W (1.00mm x 0.50mm)", Supplier 1=DigiKey, Thickness (Max)="0.022\" (0.55mm)"
D1 D2: "TVS DIODE 5V SOT23", Capacitance @ Frequency="0.9pF @ 1MHz", Device Package="TO-236-3, SC-59, SOT-23-3", Manufacturer="Nexperia USA Inc.", Operating Temperature="-55°C ~ 150°C (TA)", Power Line Protection=No, Supplier Device Package=TO-236AB, Supplier Part Number 1=1727-4160-1-ND, Voltage - Breakdown (Min)=5.8V, Voltage - Reverse Standoff (Typ)="5V (Max)", Applications=Automotive, Bidirectional Channels=1, ComponentLink1Description=Datasheet, ComponentLink1URL=https://assets.nexperia.com/documents/data-sheet/PESD5V0X1BQ_PESD5V0X1BT.pdf, ComponentLink2Description="DigiKey Link", ComponentLink2URL=http://digikey.com/product-detail/en/nexperia-usa-inc/PESD5V0X1BT215/1727-4160-1-ND/1993013, LastUpdated="2020-02-03 5:12:31 PM", Lifecycle Status=Active, Minimum Order=1, Mounting Type="Surface Mount", Package / Case="TO-236-3, SC-59, SOT-23-3", Packaging=TapeAndReel, Part Number=PESD5V0X1BT,215, Part Status=Active, Price=0.08, Series="Automotive, AEC-Q101", Supplier 1=DigiKey, Type=Zener, Unidirectional Channels=2
D4 D5 D6: library part APT3216LSECK/J3-PRV, "LED RED CLEAR 2SMD", Current - Test=2mA, Device Package="1206 (3216 Metric)", Lens Color=Colorless, Manufacturer=Kingbright, Millicandela Rating=40mcd, Supplier Device Package=2-SMD, Supplier Part Number 1=754-1940-1-ND, Voltage - Forward (Vf) (Typ)=1.8V, Color=Red, ComponentLink1Description=Datasheet, ComponentLink1URL=http://www.kingbrightusa.com/images/catalog/SPEC/APT3216LSECK-J3-PRV.pdf, ComponentLink2Description="DigiKey Link", ComponentLink2URL=http://digikey.com/product-detail/en/kingbright/APT3216LSECK-J3-PRV/754-1940-1-ND/5177470, Configuration=Standard, Height (Max)=0.75mm, LastUpdated="2020-02-03 5:16:26 PM", Lens Size="1.90mm x 1.60mm", Lens Style="Rectangle with Flat Top", Lens Transparency=Clear, Lifecycle Status=Active, Minimum Order=1, Mounting Type="Surface Mount", Package / Case="1206 (3216 Metric)", Packaging=TapeAndReel, Part Number=APT3216LSECK/J3-PRV, Part Status=Active, Price=0.16, Series=HELI2, Size / Dimension="3.20mm L x 1.60mm W", Supplier 1=DigiKey, Viewing Angle=120°, Wavelength - Dominant=625nm, Wavelength - Peak=640nm
IC2: "IC AFE 2 CHAN 24BIT 32TQFP", Device Package=32-TQFP, Manufacturer="Texas Instruments", Power (Watts)=740µW, Supplier Part Number 1=296-30331-5-ND, Voltage - Supply, Analog="2.7V ~ 5.25V", Voltage - Supply, Digital="1.7V ~ 3.6V", ComponentLink1Description=Datasheet, ComponentLink1URL=http://www.ti.com/general/docs/suppproductinfo.tsp?distId=10&gotoUrl=http%3A%2F%2Fwww.ti.com%2Flit%2Fgpn%2Fads1292, ComponentLink2Description="DigiKey Link", ComponentLink2URL=https://www.digikey.com/product-detail/en/texas-instruments/ADS1292RIPBS/296-30331-5-ND/3137204, LastUpdated="2020-09-04 9:42:30 PM", Lifecycle Status=1, Minimum Order=1, Mounting Type="Surface Mount", Number of Bits=24, Number of Channels=2, Package / Case=32-TQFP, Packaging="32-TQFP (5x5)", Part Number=ADS1292RIPBS, Part Status=Active, Price=10.68, Supplier 1=Digikey
J1: "AUDIO JACK, 3.5 MM, RT, 4 CONDUC", Current Rating=1A, Device Package="Tape and Reel", Manufacturer="CUI Devices", Supplier Part Number 1=CP-SJ2-3574A-SMT-TR-ND, Voltage - Rated=12VDC, ComponentLink1Description=Datasheet, ComponentLink1URL=https://www.cuidevices.com/product/resource/digikeypdf/sj2-357x-smt.pdf, ComponentLink2Description="DigiKey Link", ComponentLink2URL=https://www.digikey.com/en/products/detail/cui-devices/SJ2-3574A-SMT-TR/6619530?s=N4IgTCBcDaIMoCkwFoDMBWA7AFgILLgFkAVZYgJRAF0BfIA, Connector Type="Phone Jack", Features="Board Guide", Gender=Female, Internal Switch(s)="Does Not Contain Switch", LastUpdated="2020-08-26 1:45:56 AM", Lifecycle Status=1, Mating Length/Depth="0.551\"\" (14.00mm)", Minimum Order=1, Mounting Type="Surface Mount, Right Angle", Number of Positions/Contacts="4 Conductors, 4 Contacts", Packaging="Tape and Reel", Part Number=SJ2-3574A-SMT-TR, Part Status=Active, Price=1.15, Series=SJ2, Shielding=Unshielded, Supplier 1=DigiKey
J2: "CONN HDR 8/10P 0.1 GOLD PCB 6PC", Insulation Color=Black, Manufacturer="Schmartboard, Inc.", Supplier Part Number 1=1988-1036-ND, ComponentLink1Description=Datasheet, ComponentLink1URL=http://schmartboard.com/content/Brochures/920-0088-01.pdf, ComponentLink2Description="DigiKey Link", ComponentLink2URL=http://digikey.com/product-detail/en/schmartboard-inc/920-0088-01/1988-1036-ND/9559319, Connector Type=Header, Contact Finish - Mating=Gold, Contact Finish - Post=Gold, Contact Length - Post="0.413\" (10.50mm)", Contact Type="Female Socket", Fastening Type=Push-Pull, Insulation Height="0.335\" (8.51mm)", LastUpdated="2020-02-03 5:11:42 PM", Lifecycle Status=Active, Minimum Order=1, Mounting Type="Through Hole", Number of Positions="6, 8, 10", Number of Positions Loaded=All, Number of Rows=1, Packaging=Bulk, Part Number=920-0088-01, Part Status=Active, Pitch - Mating="0.100\" (2.54mm)", Price=5.00, Series=-, Style="Board to Board", Supplier 1=DigiKey, Termination=Solder
J3 J4: "Header, 5-Pin, Dual row", LatestRevisionDate=17-Jul-2002, LatestRevisionNote="Re-released for DXP Platform.", Publisher="Altium Limited"
J5: "CONN HEADER VERT 3POS 2.54MM", Insulation Color=Natural, Manufacturer=Molex, Material Flammability Rating="UL94 V-0", Supplier Part Number 1=WM4112-ND, ComponentLink1Description=Datasheet, ComponentLink1URL=https://www.molex.com/pdm_docs/sd/022272031_sd.pdf, ComponentLink2Description="DigiKey Link", ComponentLink2URL=http://digikey.com/product-detail/en/molex/0022272031/WM4112-ND/1130578, Connector Type=Header, Contact Finish - Mating=Tin, Contact Finish - Post=Tin, Contact Finish Thickness - Mating="100.0µin (2.54µm)", Contact Length - Mating="0.295\" (7.49mm)", Contact Length - Post="0.140\" (3.56mm)", Contact Material=Brass, Contact Shape=Square, Contact Type="Male Pin", Fastening Type="Friction Lock", Insulation Height="0.461\" (11.70mm)", Insulation Material="Polyamide (PA), Nylon", LastUpdated="2020-02-03 5:11:43 PM", Lifecycle Status=Active, Minimum Order=1, Mounting Type="Through Hole", Number of Positions=3, Number of Positions Loaded=All, Number of Rows=1, Overall Contact Length="0.560\" (14.22mm)", Packaging=Bulk, Part Number=0022272031, Part Status=Active, Pitch - Mating="0.100\" (2.54mm)", Price=0.37, Series="KK 6410", Shrouding="Shrouded - 1 Wall", Style="Board to Cable/Wire", Supplier 1=DigiKey, Termination=Solder
L1: library part MLF1005GR56JT000, "FIXED IND 560NH 45MA 470 MOHM", Current Rating (Amps)=45mA, DC Resistance (DCR)="470mOhm Max", Device Package="0402 (1005 Metric)", Frequency - Self Resonant=170MHz, Inductance Frequency - Test=10MHz, Manufacturer="TDK Corporation", Operating Temperature="-55°C ~ 125°C", Q @ Freq="30 @ 10MHz", Supplier Part Number 1=445-15694-1-ND, Tolerance=±5%, ComponentLink1Description=Datasheet, ComponentLink1URL=https://product.tdk.com/info/en/catalog/datasheets/inductor_commercial_standard_mlf1005_en.pdf?ref_disty=digikey, ComponentLink2Description="DigiKey Link", ComponentLink2URL=http://digikey.com/product-detail/en/tdk-corporation/MLF1005GR56JT000/445-15694-1-ND/4327990, Height - Seated (Max)="0.022\" (0.55mm)", Inductance=560nH, LastUpdated="2020-02-03 5:15:45 PM", Lifecycle Status=Active, Material - Core=Ferrite, Minimum Order=1, Mounting Type="Surface Mount", Package / Case="0402 (1005 Metric)", Packaging=TapeAndReel, Part Number=MLF1005GR56JT000, Part Status=Active, Price=0.10, Series=MLF, Shielding=Shielded, Size / Dimension="0.039\" L x 0.020\" W (1.00mm x 0.50mm)", Supplier 1=DigiKey, Supplier Device Package="0402 (1005 Metric)", Type=Multilayer
R1 R3 R5 R6 R7 R8 R27 R30 R33: library part AC0402FR-0710KL, "RES SMD 10K OHM 1% 1/16W 0402", Device Package="0402 (1005 Metric)", Manufacturer=Yageo, Operating Temperature="-55°C ~ 155°C", Power (Watts)="0.063W, 1/16W", Ratings=AEC-Q200, Supplier Device Package=0402, Supplier Part Number 1=YAG3436CT-ND, Temperature Coefficient=±100ppm/°C, Tolerance=±1%, ComponentLink1Description=Datasheet, ComponentLink1URL=https://www.yageo.com/upload/media/product/productsearch/datasheet/rchip/PYu-AC_51_RoHS_L_7.pdf, ComponentLink2Description="DigiKey Link", ComponentLink2URL=http://digikey.com/product-detail/en/yageo/AC0402FR-0710KL/YAG3436CT-ND/6006285, Composition="Thick Film", Features="Automotive AEC-Q200, Moisture Resistant", Height - Seated (Max)="0.015\" (0.37mm)", LastUpdated="2020-02-19 6:28:05 AM", Lifecycle Status=Active, Minimum Order=1, Number of Terminations=2, Package / Case="0402 (1005 Metric)", Packaging=CutTape, Part Number=AC0402FR-0710KL, Part Status=Active, Price=0.10, Resistance="10 kΩ", Series=AC, Size / Dimension="0.039\" L x 0.020\" W (1.00mm x 0.50mm)", Supplier 1=DigiKey
R2 R31 R32: library part CRCW04021K60FKED, "RES SMD 1.6K OHM 1% 1/16W 0402", Device Package="0402 (1005 Metric)", Manufacturer="Vishay Dale", Operating Temperature="-55°C ~ 155°C", Power (Watts)="0.063W, 1/16W", Ratings=AEC-Q200, Supplier Device Package=0402, Supplier Part Number 1=541-1.60KLCT-ND, Temperature Coefficient=±100ppm/°C, Tolerance=±1%, ComponentLink1Description=Datasheet, ComponentLink1URL=http://www.vishay.com/docs/20035/dcrcwe3.pdf, ComponentLink2Description="DigiKey Link", ComponentLink2URL=http://digikey.com/product-detail/en/vishay-dale/CRCW04021K60FKED/541-1.60KLCT-ND/1183144, Composition="Thick Film", Features="Automotive AEC-Q200", Height - Seated (Max)="0.016\" (0.40mm)", LastUpdated="2020-02-19 6:28:05 AM", Lifecycle Status=Active, Minimum Order=1, Number of Terminations=2, Package / Case="0402 (1005 Metric)", Packaging=CutTape, Part Number=CRCW04021K60FKED, Part Status=Active, Price=0.10, Resistance="1.6 kΩ", Series=CRCW, Size / Dimension="0.039\" L x 0.020\" W (1.00mm x 0.50mm)", Supplier 1=DigiKey
R4 R13 R17 R19 R21 R26: library part AC0402FR-07100KL, "RES SMD 100K OHM 1% 1/16W 0402", Device Package="0402 (1005 Metric)", Manufacturer=Yageo, Operating Temperature="-55°C ~ 155°C", Power (Watts)="0.063W, 1/16W", Ratings=AEC-Q200, Supplier Device Package=0402, Supplier Part Number 1=YAG3434CT-ND, Temperature Coefficient=±100ppm/°C, Tolerance=±1%, ComponentLink1Description=Datasheet, ComponentLink1URL=https://www.yageo.com/upload/media/product/productsearch/datasheet/rchip/PYu-AC_51_RoHS_L_7.pdf, ComponentLink2Description="DigiKey Link", ComponentLink2URL=http://digikey.com/product-detail/en/yageo/AC0402FR-07100KL/YAG3434CT-ND/6006283, Composition="Thick Film", Features="Automotive AEC-Q200, Moisture Resistant", Height - Seated (Max)="0.015\" (0.37mm)", LastUpdated="2020-02-19 6:28:05 AM", Lifecycle Status=Active, Minimum Order=1, Number of Terminations=2, Package / Case="0402 (1005 Metric)", Packaging=CutTape, Part Number=AC0402FR-07100KL, Part Status=Active, Price=0.10, Resistance="100 kΩ", Series=AC, Size / Dimension="0.039\" L x 0.020\" W (1.00mm x 0.50mm)", Supplier 1=DigiKey
R9 R12 R23 R25: library part AC0402FR-0710ML, "RES SMD 10M OHM 1% 1/16W 0402", Device Package="0402 (1005 Metric)", Manufacturer=Yageo, Operating Temperature="-55°C ~ 155°C", Power (Watts)="0.063W, 1/16W", Ratings=AEC-Q200, Supplier Device Package=0402, Supplier Part Number 1=YAG3437CT-ND, Temperature Coefficient=±100ppm/°C, Tolerance=±1%, ComponentLink1Description=Datasheet, ComponentLink1URL=https://www.yageo.com/upload/media/product/productsearch/datasheet/rchip/PYu-AC_51_RoHS_L_7.pdf, ComponentLink2Description="DigiKey Link", ComponentLink2URL=http://digikey.com/product-detail/en/yageo/AC0402FR-0710ML/YAG3437CT-ND/6006286, Composition="Thick Film", Features="Automotive AEC-Q200, Moisture Resistant", Height - Seated (Max)="0.015\" (0.37mm)", LastUpdated="2020-02-19 6:28:05 AM", Lifecycle Status=Active, Minimum Order=1, Number of Terminations=2, Package / Case="0402 (1005 Metric)", Packaging=CutTape, Part Number=AC0402FR-0710ML, Part Status=Active, Price=0.10, Resistance="10 MΩ", Series=AC, Size / Dimension="0.039\" L x 0.020\" W (1.00mm x 0.50mm)", Supplier 1=DigiKey
R10: library part AC0402FR-071ML, "RES SMD 1M OHM 1% 1/16W 0402", Device Package="0402 (1005 Metric)", Manufacturer=Yageo, Operating Temperature="-55°C ~ 155°C", Power (Watts)="0.063W, 1/16W", Ratings=AEC-Q200, Supplier Device Package=0402, Supplier Part Number 1=YAG3450CT-ND, Temperature Coefficient=±100ppm/°C, Tolerance=±1%, ComponentLink1Description=Datasheet, ComponentLink1URL=https://www.yageo.com/upload/media/product/productsearch/datasheet/rchip/PYu-AC_51_RoHS_L_7.pdf, ComponentLink2Description="DigiKey Link", ComponentLink2URL=http://digikey.com/product-detail/en/yageo/AC0402FR-071ML/YAG3450CT-ND/6006299, Composition="Thick Film", Features="Automotive AEC-Q200, Moisture Resistant", Height - Seated (Max)="0.015\" (0.37mm)", LastUpdated="2020-02-19 6:28:05 AM", Lifecycle Status=Active, Minimum Order=1, Number of Terminations=2, Package / Case="0402 (1005 Metric)", Packaging=CutTape, Part Number=AC0402FR-071ML, Part Status=Active, Price=0.10, Resistance="1 MΩ", Series=AC, Size / Dimension="0.039\" L x 0.020\" W (1.00mm x 0.50mm)", Supplier 1=DigiKey
R11 R15 R18 R20 R24: library part 5112, "0402 JUMPER ON TAPE AND REEL", Device Package="0402 (1005 Metric)", Manufacturer="Keystone Electronics", Power (Watts)="0.5W, 1/2W", Supplier Device Package=0402, Supplier Part Number 1=36-5112-1-ND, Tolerance=Jumper, ComponentLink1Description=Datasheet, ComponentLink1URL=http://www.keystoneelectronics.net/ENG._DEPT/WEB_ORACLE/PDF/PDF%20CAT%20NO%20DRAWINGS/5000-5999/5112.PDF, ComponentLink2Description="DigiKey Link", ComponentLink2URL=http://digikey.com/product-detail/en/keystone-electronics/5112/36-5112-1-ND/9921855, Composition="Metal Element", Height - Seated (Max)="0.020\" (0.50mm)", LastUpdated="2020-02-19 6:28:05 AM", Lifecycle Status=Active, Minimum Order=1, Number of Terminations=2, Package / Case="0402 (1005 Metric)", Packaging=TapeAndReel, Part Number=5112, Part Status=Active, Price=0.19, Resistance="0 Ω", Series=-, Size / Dimension="0.039\" L x 0.020\" W (1.00mm x 0.50mm)", Supplier 1=DigiKey
R14 R22: library part AT0402BRD0740K2L, "RES SMD 40.2KOHM 0.1% 1/16W 0402", Device Package="0402 (1005 Metric)", Manufacturer=Yageo, Operating Temperature="-55°C ~ 155°C", Power (Watts)="0.063W, 1/16W", Ratings=AEC-Q200, Supplier Device Package=0402, Supplier Part Number 1=YAG2090CT-ND, Temperature Coefficient=±25ppm/°C, Tolerance=±0.1%, ComponentLink1Description=Datasheet, ComponentLink1URL=http://www.yageo.com/documents/recent/PYu-AT_51_RoHS_L_5.pdf, ComponentLink2Description="DigiKey Link", ComponentLink2URL=http://digikey.com/product-detail/en/yageo/AT0402BRD0740K2L/YAG2090CT-ND/5139538, Composition="Thin Film", Features="Anti-Sulfur, Automotive AEC-Q200, Moisture Resistant", Height - Seated (Max)="0.014\" (0.35mm)", LastUpdated="2020-02-19 6:28:05 AM", Lifecycle Status=Active, Minimum Order=1, Number of Terminations=2, Package / Case="0402 (1005 Metric)", Packaging=TapeAndReel, Part Number=AT0402BRD0740K2L, Part Status=Active, Price=0.09, Resistance="40.2 kΩ", Series=AT, Size / Dimension="0.039\" L x 0.020\" W (1.00mm x 0.50mm)", Supplier 1=DigiKey
S1 S2: "SWITCH SLIDE SPDT 300MA 4V", Current Rating (Amps)="300mA (DC)", Manufacturer="Nidec Copal Electronics", Operating Temperature="-20°C ~ 70°C", Supplier Part Number 1=563-1102-1-ND, Voltage Rating - AC=4V, Actuator Length=1.50mm, Actuator Type=Standard, Circuit=SPDT, ComponentLink1Description=Datasheet, ComponentLink1URL=https://www.nidec-copal-electronics.com/e/catalog/switch/cus.pdf, ComponentLink2Description="DigiKey Link", ComponentLink2URL=https://www.digikey.com/product-detail/en/nidec-copal-electronics/CUS-12TB/563-1102-2-ND/1124222, Contact Finish=Gold, Contact Material="Copper Alloy", Contact Timing="Non-Shorting (BBM)", LastUpdated="2020-03-02 6:46:22 AM", Lifecycle Status=Active, Minimum Order=1, Mounting Type="Surface Mount, Right Angle", Packaging=TapeAndReel, Part Number=CUS-12TB, Part Status=Active, Price=0.71, Series=CUS, Supplier 1=DigiKey, Switch Function=On-On, Termination Style="Gull Wing", Voltage Rating - DC=4V
S3 S4: "SWITCH TACTILE SPST-NO 0.05A 24V", Contact Rating @ Voltage="0.05A @ 24VDC", Manufacturer="TE Connectivity ALCOSWITCH Switches", Operating Force=260gf, Operating Temperature="-35°C ~ 85°C", Supplier Part Number 1=450-2055-1-ND, Actuator Height off PCB, Vertical=5.00mm, Actuator Orientation="Top Actuated", Actuator Type=Standard, Circuit=SPST-NO, ComponentLink1Description=Datasheet, ComponentLink1URL=https://www.te.com/commerce/DocumentDelivery/DDEController?Action=srchrtrv&DocNm=1308111-1_SWITCHES_CORE_PROGRAM_CATALOG&DocType=CS&DocLang=English, ComponentLink2Description="DigiKey Link", ComponentLink2URL=http://digikey.com/product-detail/en/te-connectivity-alcoswitch-switches/1571563-4/450-2055-1-ND/4569745, Illumination=Non-Illuminated, LastUpdated="2020-12-16 5:46:49 AM", Lifecycle Status=Active, Minimum Order=1, Mounting Type="Surface Mount", Outline="6.00mm x 6.00mm", Packaging=TapeAndReel, Part Number=1571563-4, Part Status=Active, Price=0.16, Series=FSMJSMA, Supplier 1=DigiKey, Switch Function=Off-Mom, Termination Style="Gull Wing"
TP1 TP10 TP16: "2MM Circular Test Point", Part Number=TP2MM
TP5 TP6 TP7 TP8 TP9 TP11 TP12 TP13 TP14 TP15: "1MM Circular Test Point", Part Number=TP1MM

## Via types
v1: diameter 0.5, hole 0.3, Top Layer to Bottom Layer, 62 vias
v2: diameter 0.5, hole 0.3, Top Layer to Bottom Layer, tented both sides, 12 vias

## Nets (pads, with @x,y where several pads share a name; then routed paths per layer and width w, separated by ;. In a path a pad name is that pad's centre, name@x,y a point inside that pad or via, vN(x,y) a via of type N, cw(c..) or ccw(c..) an arc to the next point about the centre after c; other vN are vias at no path point)
+3V3: C5.1 C6.1 C7.1 C8.1 C14.1 C15.1 D4.1 IC2.23 J5.2 L1.1 R1.1 R5.1 R7.1 S1.3 S2.3 TP1.1 | length 140
  Top Layer w0.3: IC2.23 44.4,29.836 ; L1.1 44.44,21.15 44.54,21.25 44.59,21.25 45.18,21.84 C14.1 C15.1 49.506,21.84 49.546,21.8 v1(49.6,21.8) 50,21.4 TP1.1 ; v1(44.5,30.7) 44.5,30.646 44.4,30.546 44.4,29.836 ; v1(45.5,32.8) 45.485,32.785 C8.1 C7.1 45.485,30.09 45.231,29.836 44.4,29.836 ; v2(66.7,45.5) 66.738,45.538 67.088,45.538 68.4,46.85 R1.1
  Top Layer w0.6: S1.3 3.5,51.4 5.589,49.311 5.589,48.511 D4.1 ; D4.1@5.961,48.1 6.411,48.55 6.411,49.311 8.4,51.3 15,51.3 16,52.3 ; S2.3 16,52.3 ; v1(16.6,51.7) 16,52.3
  Power w0.3: v1(43.9,26.2) 43.954,26.2 44.154,26.4 49.6,26.4 ; v1(45.5,32.8) 46.2,33.5 49.6,33.5 ; 55.778,34.322 55.778,34.578 v2(66.7,45.5)
  Power w0.6: v1(16.6,51.7) 24.3,44 45,44 52.3,36.7 52.3,34.9 ; v1(49.6,21.8) 49.6,26.4 49.6,33.5 51,34.9 52.3,34.9 ; J5.2 56.356,32.044 56.356,33.744 55.778,34.322 55.2,34.9 52.3,34.9
  Bottom Layer w0.3: R5.1 41.734,27.876 41.884,27.726 41.959,27.726 42.159,27.526 42.179,27.526 42.8,26.905 42.8,26.1 ; R7.1 42.4,24.35 42.55,24.5 42.624,24.5 42.8,24.676 42.8,26.1 ; v1(43.9,26.2) 43.846,26.2 43.746,26.1 42.8,26.1 ; v1(44.5,30.7) 44.54,30.7 44.776,30.936 45.485,30.936 ; C6.1 45.485,30.936 ; C5.1 45.485,30.936
+3V3_EXT: C24.1 C25.1 J3.5 J3.6 J5.3 R3.1 R27.1 | length 57.7
  Top Layer w0.3: J3.5 85.08,4.445 87.6,1.925 87.6,1.85 87.75,1.7 R3.1 ; J3.6 85.08,11.28 87.1,13.3 87.675,13.3 R27.1
  Power w0.6: J5.3 61.72,31.9 J3.6
  Bottom Layer w0.6: C25.1 84.22,14.26 C24.1 85.8,9.504 85.08,8.784 J3.6 J3.5
+3V3_MCU: J2.4 J5.1 | length 31.6
  Power w0.6: J2.4 40.41,9.81 53.96,23.36 J5.1
\R\S\T\_\M\C\U\: J2.3 S3.1 S3.2 | length 42.8
  Top Layer w0.25: S3.2 12.778,7.75 13.336,7.192 13.336,6.964 14.9,5.4 29.5,5.4 31.3,3.6 37,3.6 37.87,4.47 J2.3
  Top Layer w0.3: S3.1 3.475,7.775 7.275,7.775 v2(7.3,7.8) ; S3.2 12.575,7.775 14.875,7.775 v2(14.9,7.8)
  Power w0.3: v2(7.3,7.8) v2(14.9,7.8)
AVDD: C1.1 C2.1 C3.1 C4.1 C26.1 C27.1 C28.1 IC2.12 L1.2 R9.1 R23.1 TP10.1 | length 47.8
  Top Layer w0.3: v1(39.321,26.868) 39.325,26.864 IC2.12 39.325,23.775 39.6,23.5 v1(40.7,23.5) 41.04,23.16 C3.1 C4.1 ; L1.2 41.14,21.1 C4.1 ; TP10.1@52.6,19.6 50.9,17.9 46.1,17.9 44.699,19.301 44.56,19.44 C28.1 41.1,19.44 C1.1 C4.1
  Power w0.4: v1(31.828,33.726) 32.971,32.583 32.971,29.027 34.876,27.122 ; v1(33.098,23.82) 33.098,25.344 34.876,27.122 ; v1(39.321,26.868) 35.13,26.868 34.876,27.122
  Bottom Layer w0.3: v1(31.828,33.726) 31.866,33.688 32.067,33.688 32.746,33.009 32.821,33.009 32.971,32.859 R23.1 32.851,32.904 R23.1@32.844,32.904 ; v1(33.098,23.82) R9.1 ; v1(40.7,23.5) 41.04,23.16 C26.1 C27.1 C2.1
BUTTON1: J2.15 R1.2 S4.1 S4.2 | length 93.7
  Top Layer w0.3: S4.1 S4.2 34.85,7.75 v2(38.6,11.5) ; J2.15 68.375,54.105 68.375,48.1 R1.2
  Bottom Layer w0.3: v2(38.6,11.5) 41.2,14.1 55.9,14.1 70,28.2 70,52.28 68.35,53.93 J2.15
C\S\: IC2.18 J2.25 TP9.1 | length 39.8
  Top Layer w0.3: J2.25 41.679,53.881 41.679,53.021 50.9,43.8 50.9,42 ; IC2.18 44.257,27.336 44.893,26.7 48.7,26.7 50.9,28.9 50.9,42 ; TP9.1 50.9,42
D\R\D\Y\_\E\C\G\: IC2.22 J2.17 R8.1 | length 51.6
  Top Layer w0.25: v1(41.3,29.8) 41.764,29.336 IC2.22
  Bottom Layer w0.25: v1(41.3,29.8) 42.2,29.8 ; R8.1 44.1,31.3 42.6,29.8 42.2,29.8 ; J2.17 63.27,32.47 58.5,27.7 44.3,27.7 42.2,29.8
GND: C1.2 C2.2 C3.2 C4.2 C5.2 C6.2 C7.2 C8.2 C10.2 C12.2 C13.2 C14.2 C15.2 C23.2 C24.2 C25.2 C26.2 C27.2 C28.2 C29.2 C30.2 D1.1 D2.1 IC2.10 IC2.13 IC2.24 J2.6 J2.7 J2.29 J3.3 J3.4 J3.7 J3.8 J4.4 J4.7 J4.10 R2.1 R4.2 R6.2 R8.2 R12.1 R25.1 R26.2 R30.2 R31.1 R32.1 R33.2 S3.3 S3.4 S4.3 S4.4 TP16.1 | length 53.6
  Top Layer w0.3: S3.3 3.6,3.1 v2(3.6,1.6) ; v2(12.5,1.6) 12.5,3.2 S3.4 ; v2(16.8,4.6) 16.838,4.562 16.838,3.785 17.373,3.25 S4.3 ; v2(26.2,4.7) 26.55,4.35 S4.4 ; R4.2 31.813,49.113 32.988,49.113 v2(33,49.1) ; v1(36.527,20.899) C10.2 ; v1(37.797,23.947) 38.325,24.475 IC2.10 ; v1(38.432,20.899) C13.2 ; R26.2 39.013,49.212 40.188,49.212 v2(40.2,49.2) ; v1(39.2,20.4) 39.652,20.852 40.012,20.852 C4.2 ; v1(39.3,22.5) C3.2 ; IC2.13 39.825,24.459 v1(40.079,24.205) ; v1(40.1,18.4) 40.1,18.454 40.16,18.514 C1.2 ; v1(42.623,31.059) 42.623,30.336 IC2.24 ; C28.2 42.76,18.5 v1(43.8,18.5) ; C14.2 46.1,20.86 v1(46.1,20) ; C7.2 46.365,30.13 46.515,30.28 46.67,30.28 v1(47.322,30.932) ; C8.2 46.365,32.588 46.433,32.656 v1(46.433,32.71) ; v1(47.5,19.8) C15.2 ; TP16.1 56.3,19.6 v1(58.1,19.6)
  Top Layer w0.4: R30.2 8.9,52.8 v1(9.5,53.4) ; v1(8.5,42.1) R2.1 ; R31.1 v1(8.5,49.6) ; v1(18.7,41.8) R32.1 ; R33.2 19.6,52.9 19.9,52.9 v1(20.8,53.8) ; v1(23.319,32.075) 23.346,32.075 23.406,32.135 D2.1 ; D1.1 28.266,22.937 v1(28.272,22.931) ; C29.2 v1(74.4,12.2) ; C30.2 76.1,11.14 v1(76.1,12.2)
  Bottom Layer w0.3: v1(34.876,23.947) R12.1 ; R25.1 35.785,32.784 35.838,32.837 v1(35.892,32.837) ; v1(35.3,22) 35.354,22 35.414,22.06 C23.2 ; v1(39.2,19.3) 39.254,19.3 39.454,19.5 C2.2 ; v1(39.3,21.5) 39.652,21.148 40.012,21.148 C27.2 ; v1(39.3,22.5) C26.2 ; C12.2 39.468,28.781 39.73,28.519 v1(40.464,28.519) ; R8.2 44.1,33.45 44.25,33.6 v1(45.1,33.6) ; C6.2 46.365,30.09 46.515,29.94 46.535,29.94 46.775,29.7 v1(47.2,29.7) ; C5.2 47.061,31.761 47.357,32.057 v1(47.357,32.1)
  Bottom Layer w0.4: v1(43.8,24.6) 44.625,24.6 45.25,25.225 45.25,25.3 45.35,25.4 R6.2 ; C25.2 v1(84.2,16.2) ; C24.2 v1(85.8,16.2)
GPIO1: J2.24 J4.9 | length 60
  Bottom Layer w0.3: J2.24 43.97,54.33 47.74,58.1 89.8,58.1 93.3,54.6 93.3,50.476 92.824,50 J4.9
GPIO2: J2.23 J4.8 | length 45.7
  Bottom Layer w0.3: J2.23 46.51,54.33 49.28,57.1 85.4,57.1 87.62,54.88 J4.8
GPIO3: J2.22 J4.6 | length 37.2
  Bottom Layer w0.3: J2.22 50.57,54.33 52.64,56.4 81.22,56.4 J4.6
GPIO4: J2.21 J4.5 | length 38.8
  Top Layer w0.3: J2.21 53.11,53.93 63.04,44 79.08,44 J4.5
GPIO5: J2.20 J4.3 | length 33.1
  Top Layer w0.3: J2.20 55.65,53.93 64.88,44.7 77.24,44.7 J4.3
GPIO6: J2.19 J4.2 | length 24.8
  Top Layer w0.3: J2.19 58.19,54.33 60.66,56.8 75.74,56.8 J4.2
GPIO7: J2.18 J4.1 | length 22.6
  Top Layer w0.3: J2.18 60.73,54.33 62.4,56 70.7,56 76.7,50 J4.1
I2C_SCL: J2.32 J3.9 R3.2 TP14.1 | length 104.1
  Top Layer w0.3: J2.32 23.65,54.33 26.82,57.5 47.1,57.5 49,55.6 49,51.1 TP14.1 78.6,21.5 85.6,21.5 91.3,15.8 91.3,7.14 J3.9 88.975,4.815 R3.2
I2C_SDA: J2.31 J3.10 R27.2 TP15.1 | length 95.7
  Top Layer w0.3: J2.31 26.19,54.33 28.26,56.4 47.493,56.4 48.3,55.593 48.3,49.5 68.8,29 TP15.1 73.7,20.5 84.2,20.5 89.2,15.5 89.2,12.6 88.625,12.025 R27.2 87.8,11.95 90.01,9.74 90.01,8.69 J3.10
IN_N: J1.3 R21.2 TP13.1 | length 23.3
  Top Layer w0.3: J1.3 9.716,32.05 9.891,32.226 9.891,33.147 10.694,33.95 13.506,33.95 14.322,33.133 14.322,31.685 15.2,30.807 15.2,30.057 16.358,28.9 18.1,28.9 ; TP13.1 18.1,28.9 ; R21.2 25.143,29.475 24.993,29.325 24.993,29.075 24.818,28.9 18.1,28.9
IN_P: J1.2 R19.2 TP12.1 | length 22.5
  Top Layer w0.3: J1.2 11.9,32.05 10.567,32.05 10.391,32.226 10.391,32.94 10.901,33.45 13.299,33.45 13.822,32.926 13.822,31.478 14.7,30.6 14.7,29.85 16.151,28.4 18.2,28.4 ; TP12.1 18.1,28.3 18.2,28.4 ; R19.2 25.143,27.824 24.993,27.974 24.993,28.224 24.818,28.4 18.2,28.4
INPROT_N: C20.2 D2.2 R20.2 R21.1 | length 10
  Top Layer w0.3: R21.1 26.441,29.475 26.591,29.325 26.591,29.075 26.766,28.9 29.964,28.9 C20.2@30.388,29.324 ; R21.1@26.442,29.475 26.592,29.625 26.592,29.7 26.682,29.79 D2.2 ; C20.2@30.388,29.325 30.538,29.475 30.578,29.475 C20.2@30.728,29.325 ; C20.2@30.728,29.324 31.152,28.9 31.935,28.9 32.111,29.075 32.111,29.325 32.261,29.475 R20.2
INPROT_P: C18.2 D1.2 R18.2 R19.1 | length 10.4
  Top Layer w0.3: R19.1 26.441,27.824 26.591,27.974 26.591,28.224 26.766,28.4 29.964,28.4 C18.2@30.388,27.975 ; R19.1@26.442,27.824 26.592,27.674 26.592,27.599 26.882,27.309 D1.2 ; C18.2@30.388,27.974 30.538,27.824 30.578,27.824 30.728,27.974 30.728,28.028 31.1,28.4 31.935,28.4 32.111,28.224 32.111,27.974 32.261,27.824 R18.2
LED1: D5.1 J2.11 | length 109.2
  Top Layer w0.3: D5.1 11.974,47.726 12.674,47.726 13.2,47.2 13.2,42.5 10.5,39.8 6.4,39.8 0.9,34.3 0.9,16.6 13,4.5 14.6,4.5 15.2,3.9 15.2,2 15.8,1.4 50.4,1.4 v1(51,2)
  Bottom Layer w0.3: v1(51,2) 56.86,2 J2.11
LED2: D6.1 J2.12 | length 114.9
  Top Layer w0.3: v1(3.3,18.6) 1.6,20.3 1.6,34.1 6.8,39.3 18,39.3 20.5,41.8 20.5,47.5 19.9,48.1 D6.1
  Bottom Layer w0.3: v1(3.3,18.6) 12.1,9.8 59.34,9.8 J2.12
NetC9_1: C9.1 IC2.2 | length 2.9
  Top Layer w0.25: C9.1 34.495,30.618 35.257,29.856 35.77,29.856 35.78,29.846 36.365,29.846 IC2.2
NetC9_2: C9.2 IC2.1 | length 3
  Top Layer w0.25: C9.2 35.071,32.201 36.375,30.897 IC2.1
NetC10_1: C10.1 C23.1 IC2.9 | length 5.6
  Top Layer w0.3: v1(35.4,23) 36.398,23 C10.1 36.527,24.088 37.426,24.987 37.825,24.987 IC2.9
  Bottom Layer w0.3: v1(35.4,23) 35.454,23 35.514,22.94 C23.1
NetC11_1: C11.1 IC2.8 | length 2.8
  Top Layer w0.25: C11.1 35.198,25.098 36.375,26.275 IC2.8
NetC11_2: C11.2 IC2.7 | length 2.7
  Top Layer w0.25: C11.2 34.622,26.681 35.277,27.336 IC2.7
NetC12_1: C12.1 IC2.27 | length 2.8
  Top Layer w0.3: IC2.27 40.325,30.122 v1(40.337,30.11)
  Bottom Layer w0.3: C12.1 39.556,29.769 39.996,29.769 v1(40.337,30.11)
NetC13_1: C13.1 IC2.11 | length 2.7
  Top Layer w0.3: C13.1 38.452,22.871 38.602,23.021 38.602,23.041 38.825,23.264 IC2.11
NetC16_1: C16.1 IC2.28 R10.1 | length 7.3
  Top Layer w0.3: IC2.28 39.825,32.543 40.44,33.158 42.055,33.158 43.287,34.39 43.362,34.39 43.512,34.54 R10.1 43.647,34.75 C16.1
NetC16_2: C16.2 R10.2 R13.2 R15.1 R17.2 | length 14.5
  Top Layer w0.3: R17.2 36.975,38.619 39.604,35.99 39.679,35.99 39.829,35.84 R15.1 39.964,35.63 C16.2
NetC17_1: C17.1 R9.2 R11.2 R12.2 | length 7.1
  Bottom Layer w0.25: C17.1 31.125,24.903 31.936,24.903 32.082,25.049 32.082,26.027 32.228,26.173 R9.2 34.869,26.173 R12.2 34.809,26.247 R11.2
NetC17_2: C17.2 C18.1 C19.2 | length 14.6
  Top Layer w0.25: v1(29.542,26.935) 30.569,26.935 30.578,26.944 30.841,26.681 v1(31.701,26.681)
  Bottom Layer w0.25: v1(29.542,26.935) 29.542,32.777 31.701,34.936 C19.2 ; C17.2 31.086,25.724 31.261,25.899 31.261,25.919 31.67,26.328 31.67,26.65 v1(31.701,26.681)
NetC19_1: C19.1 R14.2 | length 2.4
  Bottom Layer w0.25: C19.1 34.868,34.876 R14.2
NetC20_1: C20.1 C21.2 C22.1 | length 13.5
  Top Layer w0.25: v1(28.907,30.364) 30.549,30.364 C20.1 31.311,30.355 v1(31.828,30.872)
  Bottom Layer w0.25: v1(28.907,30.364) 29.034,30.364 29.034,33.031 32.59,36.587 C21.2 ; C22.1 31.086,31.77 31.261,31.595 31.261,31.575 31.78,31.056 31.78,30.92 v1(31.828,30.872)
NetC21_1: C21.1 R22.2 | length 4
  Bottom Layer w0.25: C21.1 34.868,36.527 R22.2
NetC22_2: C22.2 R23.2 R24.2 R25.2 | length 6
  Bottom Layer w0.25: C22.2 31.107,32.609 31.615,32.609 32.442,31.782 32.823,31.782 R23.2 R25.2 34.809,31.567 R24.2
NetD4_2: D4.2 R2.2 | length 2.5
  Top Layer w0.3: D4.2 6.025,44.475 R2.2
NetD5_2: D5.2 R31.2 | length 4.2
  Top Layer w0.3: R31.2 8.5,46.95 8.65,46.8 8.725,46.8 10.526,44.999 11.101,44.999 D5.2
NetD6_2: D6.2 R32.2 | length 3.6
  Top Layer w0.3: D6.2 15.125,44.475 R32.2
NetIC2_3: IC2.3 R24.1 | length 3.7
  Top Layer w0.25: IC2.3 37.912,29.336 v1(37.924,29.348)
  Bottom Layer w0.25: R24.1 37.416,29.856 v1(37.924,29.348)
NetIC2_4: IC2.4 R11.1 | length 3.7
  Top Layer w0.25: IC2.4 37.42,28.836 v1(37.924,28.332)
  Bottom Layer w0.25: R11.1 v1(37.924,28.332)
NetIC2_5: IC2.5 R20.1 | length 3.4
  Top Layer w0.25: R20.1 33.561,29.475 33.736,29.3 33.736,29.225 34.625,28.336 IC2.5
NetIC2_6: IC2.6 R18.1 | length 2.9
  Top Layer w0.25: R18.1 33.498,27.836 IC2.6
NetIC2_14: IC2.14 R5.2 | length 2.9
  Top Layer w0.25: IC2.14 40.335,25.396 40.335,25.981 40.337,25.983 v1(40.337,26.868)
  Bottom Layer w0.25: v1(40.337,26.868) 40.405,26.868 40.472,26.801 R5.2
NetIC2_29: IC2.29 R13.1 | length 4.2
  Top Layer w0.3: IC2.29 39.325,32.982 40.117,33.774 40.841,33.774 41.607,34.54 R13.1
NetIC2_30: IC2.30 R15.2 | length 3.2
  Top Layer w0.3: IC2.30 38.825,33.297 39.679,34.151 39.679,34.465 R15.2
NetIC2_31: IC2.31 R14.1 | length 5.5
  Top Layer w0.25: v1(38.051,30.237) 38.325,30.511 IC2.31
  Bottom Layer w0.25: R14.1 37.162,31.126 v1(38.051,30.237)
NetIC2_32: IC2.32 R22.1 | length 4
  Top Layer w0.25: IC2.32 37.835,31.796 37.835,32.561 37.839,32.565 37.839,33.327 v1(38.432,33.92)
  Bottom Layer w0.25: v1(38.432,33.92) 38.432,34.996 R22.1
NetJ1_1: J1.1 R17.1 TP11.1 | length 30.2
  Top Layer w0.3: J1.1 13.7,25.15 v2(13.7,27.3) ; v2(13.8,35.3) 17.119,38.619 17.9,38.619 ; TP11.1 17.9,37.5 17.9,38.619 ; R17.1 17.9,38.619
  Bottom Layer w0.3: v2(13.7,27.3) 13.7,27.354 13.8,27.454 v2(13.8,35.3)
R\S\T\_\E\C\G\: IC2.15 J2.13 R7.2 | length 45.5
  Top Layer w0.3: IC2.15 40.825,24.629 41.654,23.8 46.6,23.8 ; v1(45.8,23) 46.6,23.8 ; J2.13 65.81,18.49 60.5,23.8 46.6,23.8
  Bottom Layer w0.3: R7.2 45.621,23.125 45.746,23 v1(45.8,23)
SPI_MISO: IC2.21 J2.27 R4.1 TP8.1 | length 48
  Top Layer w0.3: R4.1 33.275,50.275 33.95,50.95 ; J2.27 36.35,54.33 34.98,55.7 32.676,55.7 32.5,55.524 32.5,52.4 33.95,50.95 ; TP8.1 38.8,46.1 ; IC2.21 47.936,28.836 48.7,29.6 48.7,36.2 38.8,46.1 ; 33.95,50.95 38.8,46.1
SPI_MOSI: IC2.19 J2.26 R26.1 TP7.1 | length 40.7
  Top Layer w0.3: J2.26 38.89,52.01 39.8,51.1 ; R26.1 39,50.45 39.65,51.1 39.8,51.1 ; IC2.19 44.464,27.836 45,27.3 48.593,27.3 50,28.707 50,40.9 44.589,46.311 ; TP7.1 44.589,46.311 ; 39.8,51.1 44.589,46.311